# EAGLE board JSDM Wemos DS3231 HUB12 & 08 Single Layer (EAGLE 7.7.0)
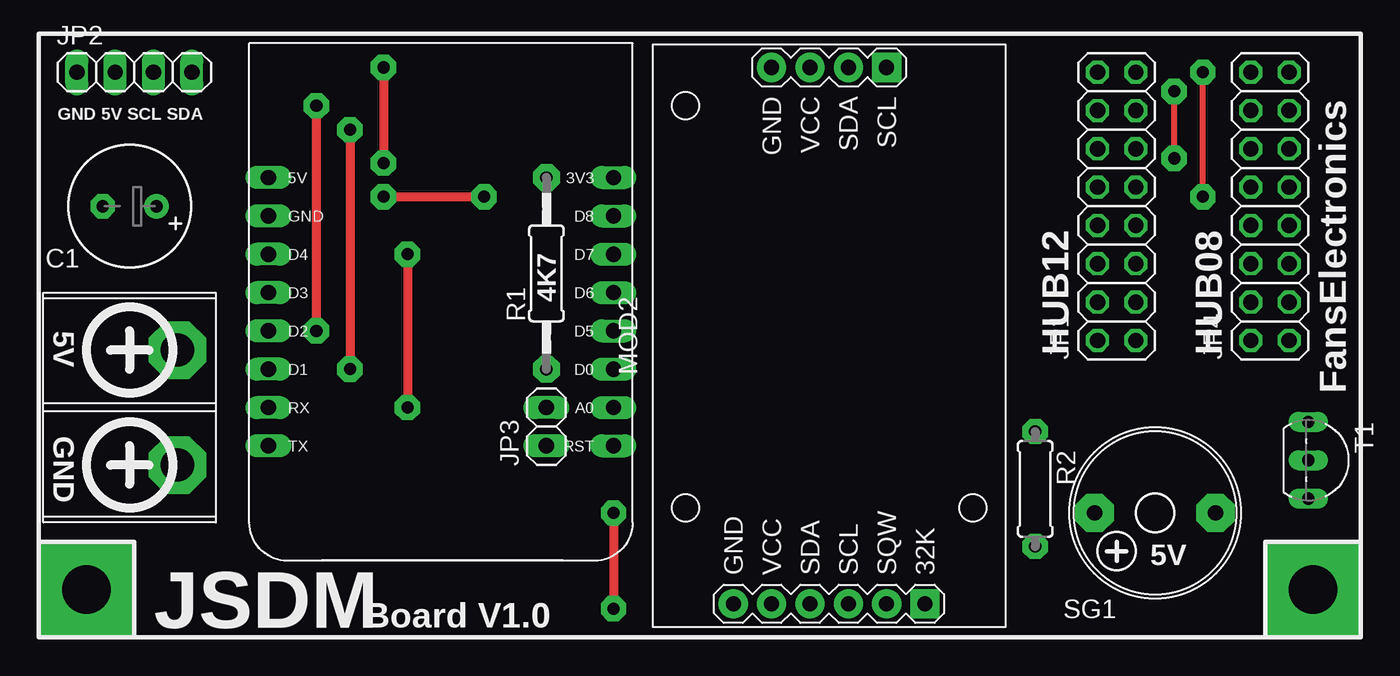
[diagram p0: board, top side]
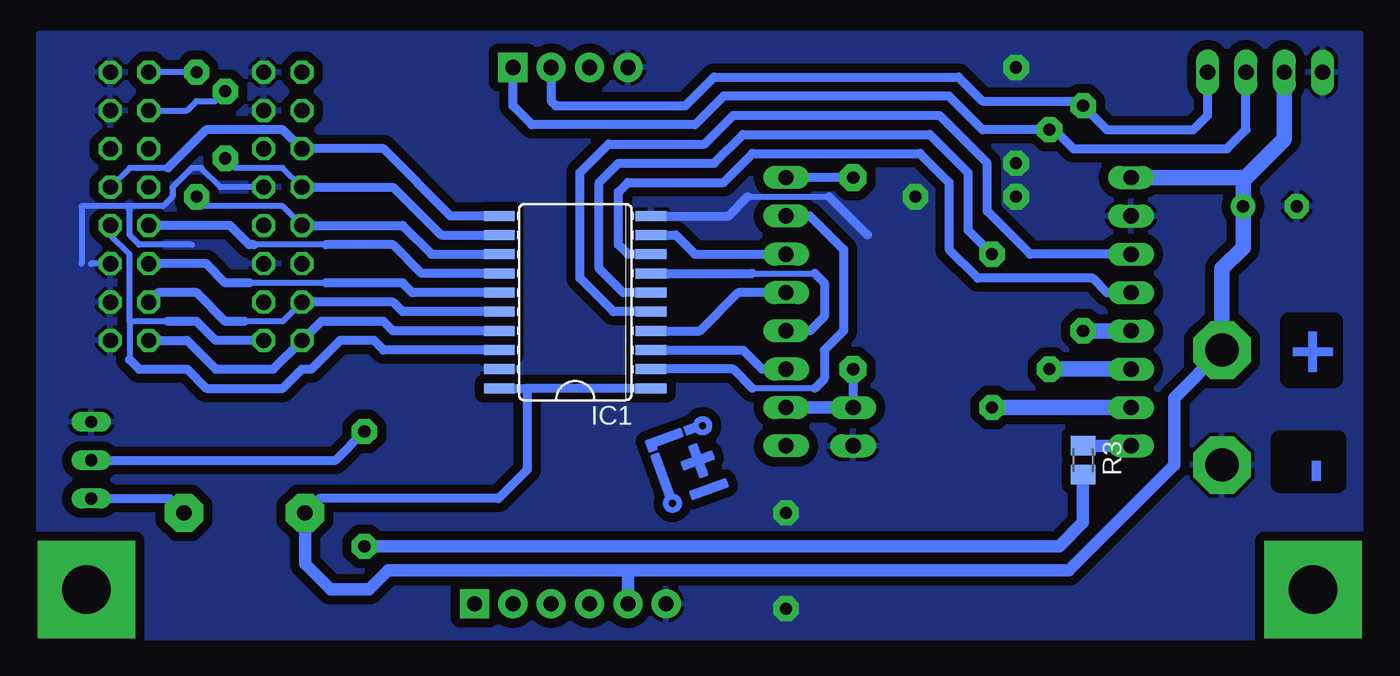
[diagram p1: board, bottom side, seen from below]

No outline drawn. Coordinates in mm, seen from the top.
Copper layers (1*16): Top 0.035mm / dielectric 1.5mm / Bottom 0.035mm
Design rules "default": minimum track width 10mil, minimum drill 24mil, track to track 8mil, track to pad 8mil, pad to pad 8mil, via to via 8mil, smd to smd 8mil, copper to edge 40mil, drill to drill 8mil, minimum pad ring 10mil, minimum via ring 8mil, stop-mask expansion 4mil, vias tented up to drill 0mil, thermal gap 10mil

## Footprints (pad centres in the part's own frame; a part is rotated, then mirrored left to right if it is on the bottom)
E3,5-8 = drill 0.813 pad 1.6: + -1.778,0 | drill 0.813 pad 1.6 octagon: - 1.778,0
SO20 = smd 0.66 x 2.032: 1 -5.715,-5.029; 2 -4.445,-5.029; 3 -3.175,-5.029; 4 -1.905,-5.029; 5 -0.635,-5.029; 6 0.635,-5.029; 7 1.905,-5.029; 8 3.175,-5.029; 9 4.445,-5.029; 10 5.715,-5.029; 11 5.715,5.029; 12 4.445,5.029; 13 3.175,5.029; 14 1.905,5.029; 15 0.635,5.029; 16 -0.635,5.029; 17 -1.905,5.029; 18 -3.175,5.029; 19 -4.445,5.029; 20 -5.715,5.029
2X08 = drill 1.016 octagon: 1 -8.89,-1.27; 2 -8.89,1.27; 3 -6.35,-1.27; 4 -6.35,1.27; 5 -3.81,-1.27; 6 -3.81,1.27; 7 -1.27,-1.27; 8 -1.27,1.27; 9 1.27,-1.27; 10 1.27,1.27; 11 3.81,-1.27; 12 3.81,1.27; 13 6.35,-1.27; 14 6.35,1.27; 15 8.89,-1.27; 16 8.89,1.27
1X04 = drill 1.016 long: 1 -3.81,0; 2 -1.27,0; 3 1.27,0; 4 3.81,0
1X02 = drill 1.016 long: 1 -1.27,0; 2 1.27,0
RTC-DS3231-MIRROR = drill 1 pad 1.93 square: J1.1 -17.78,-6.35; J2.1 17.78,-3.81 | drill 1 pad 1.93: J1.2 -17.78,-3.81; J1.3 -17.78,-1.27; J1.4 -17.78,1.27; J1.5 -17.78,3.81; J1.6 -17.78,6.35; J2.2 17.78,-1.27; J2.3 17.78,1.27; J2.4 17.78,3.81
0207/12 = drill 0.813 pad 1.778 octagon: 1 -6.35,0; 2 6.35,0
0207/7 = drill 0.813 pad 1.676 octagon: 1 -3.81,0; 2 3.81,0
M0805 = smd 1.3 x 1.6: 1 -0.95,0; 2 0.95,0
5V = drill 1.016 pad 2.54 octagon: + 4.01,0; - -4.01,0
TO92-EBC = drill 0.813 long: B 0,-1.27; C 2.54,-1.27; E -2.54,-1.27
WEMOS-D1-MINI = drill 1.016 long: 3V3 -11.43,-8.89; 5V 11.43,-8.89; A0 -11.43,6.35; D0 -11.43,3.81; D1 11.43,3.81; D2 11.43,1.27; D3 11.43,-1.27; D4 11.43,-3.81; D5 -11.43,1.27; D6 -11.43,-1.27; D7 -11.43,-3.81; D8 -11.43,-6.35; GND 11.43,-6.35; RESET -11.43,8.89; RX 11.43,6.35; TX 11.43,8.89
TB2 = drill 2.2 pad 3.81 octagon: 1 -3.81,0; 2 3.81,0

## Placement (x,y rotation side)
C1  [E3,5-8]  31.43,53.34 180 top
IC1  [SO20]  77.47,46.99 90 bottom
JP1  HUB12  [2X08]  96.84,53.34 90 top
JP2  I2C  [1X04]  31.75,62.23 0 top
JP3  [1X02]  59.05,38.73 90 top
JP4  HUB08  [2X08]  107,53.34 90 top
MOD2  RTC-3231MIRROR  [RTC-DS3231-MIRROR]  77.79,44.77 90 top
R1  10K  [0207/12]  59.05,48.9 90 top
R2  2K2  [0207/7]  91.44,34.61 270 top
R3  PROG  [M0805]  43.81,36.51 270 bottom
SG1  5V-PCB  [5V]  99.38,33.02 180 top
T1  [TO92-EBC]  110.81,36.51 270 top
WEMOS1  [WEMOS-D1-MINI]  52.07,46.35 180 top
X1  PSU  [TB2]  34.61,40.01 270 top

## Library data of the parts
C1 R1-R3 = FansElectronics-RCL
IC1 = FansElectronics-IC-74xx
JP1-JP4 = FansElectronics-Header
MOD2 = FansElectronics-Modul
SG1 = FansElectronics-Buzzer
T1 = transistor
WEMOS1 = esp8266modules
X1 = FansElectronics-Con-Screw

## Nets
+5V: C1.+ IC1.1 IC1.20 JP2.2 MOD2.J1.5 SG1.+ WEMOS1.5V X1.1
A: IC1.17 JP1.2 JP4.2
B: IC1.16 JP1.4 JP4.4
C: IC1.15 JP4.6
CLK: IC1.13 JP1.8 JP4.16
D: IC1.14 JP4.8
D0: IC1.3 WEMOS1.D0
D3: IC1.8 WEMOS1.D3
D4: IC1.5 WEMOS1.D4
D5: IC1.7 WEMOS1.D5
D6: IC1.4 WEMOS1.D6
D7: IC1.9 WEMOS1.D7
D8: IC1.2 WEMOS1.D8
GND: C1.- IC1.10 IC1.19 JP1.5 JP1.9 JP1.13 JP1.15 JP2.1 JP3.1 JP4.1 JP4.3 JP4.5 JP4.13 JP4.15 MOD2.J1.6 MOD2.J2.4 T1.E WEMOS1.GND X1.2
N$1: R1.2 WEMOS1.3V3
N$2: SG1.- T1.C
N$3: R2.1 T1.B
N$6: R2.2 R3.2
NOE: IC1.18 JP1.1 JP4.7
R1: IC1.11 JP1.12 JP4.9
RX: IC1.6 WEMOS1.RX
SCL: JP2.3 MOD2.J2.1 WEMOS1.D1
SDA: JP2.4 MOD2.J2.2 WEMOS1.D2
STB: IC1.12 JP1.10 JP4.14
TX: R3.1 WEMOS1.TX
VCC.2: MOD2.J2.3
WIPING: JP3.2 R1.1 WEMOS1.A0

## Tracks (layer width: path | path; a pad name or v marks a point on that pad's centre or on a via)
+5V
  Bottom 0.61: IC1.20 80.64,41.27 | IC1.1 80.64,41.27 | 80.64,41.27 80.64,35.88 82.55,33.97 94.42,33.97 SG1.+
  Bottom 0.813: MOD2.J1.5 73.98,29.21 | 73.98,29.21 89.85,29.21 91.12,27.94 93.66,27.94 95.37,29.64 SG1.+ | X1.1 37.78,40.64 37.78,36.2 44.77,29.21 73.98,29.21
  Bottom 1.016: WEMOS1.5V 33.02,55.24 | 33.02,55.24 30.48,57.78 JP2.2 | 33.02,55.24 33.21,55.05 C1.+ 33.21,50.61 34.61,49.21 X1.1
A
  Bottom 0.61: JP4.2 103.19,44.45 101.28,42.55 97.47,42.55 JP1.2 94.3,45.72 90.17,45.72 89.53,45.09 IC1.17
B
  Bottom 0.406: JP1.4 96.84,45.72 99.38,45.72
  Bottom 0.61: 99.38,45.72 100.65,45.72 102.55,47.62 105.09,47.62 JP4.4 | IC1.16 88.9,46.35 89.53,46.99 JP1.4
C
  Bottom 0.406: 93.98,48.26 99.06,48.26
  Bottom 0.61: IC1.15 88.27,47.62 88.9,48.26 93.98,48.26 | 99.06,48.26 100.65,48.26 101.92,49.53 JP4.6
CLK  (via drill 0.8 pad 1.68)
  Top 0.406: v102.55,53.98 v102.55,62.23
  Bottom 0.406: JP1.8 96.84,53.34 102.55,53.34 v102.55,53.98 | v102.55,62.23 JP4.16
  Bottom 0.61: JP1.8 88.9,52.07 87,50.16 IC1.13
D
  Bottom 0.406: 93.98,50.8 98.74,50.8
  Bottom 0.61: IC1.14 87.63,48.9 89.53,50.8 93.98,50.8 | 98.74,50.8 99.06,50.8 100.33,52.07 JP4.8
D0
  Bottom 0.61: IC1.3 66.36,43.81 65.09,42.55 WEMOS1.D0
D3
  Bottom 0.61: IC1.8 73.98,50.16 74.61,50.8 74.61,54.29 73.98,54.93 67.63,54.93 65.72,56.83 54.61,56.83 52.7,54.93 52.7,50.48 50.8,48.58 43.18,48.58 42.23,47.62 WEMOS1.D3
D4
  Bottom 0.61: IC1.5 74.93,46.35 77.15,48.58 77.15,55.56 75.25,57.47 68.9,57.47 66.99,59.37 53.34,59.37 50.16,56.2 50.16,53.02 47.31,50.16 WEMOS1.D4
D5
  Bottom 0.406: 65.72,48.9 61.59,48.9
  Bottom 0.61: 61.59,48.9 60.96,48.26 60.96,46.04 61.91,45.09 WEMOS1.D5 | IC1.7 65.72,48.9
D6
  Bottom 0.61: WEMOS1.D6 66.67,47.62 69.22,45.09 IC1.4
D7
  Bottom 0.61: IC1.9 70.8,51.44 69.53,50.16 WEMOS1.D7
D8
  Bottom 0.406: 61.59,41.27 65.72,41.27
  Bottom 0.61: WEMOS1.D8 61.91,52.7 59.69,50.48 59.69,45.09 60.96,43.81 60.96,41.91 61.59,41.27 | 65.72,41.27 66.99,42.55 IC1.2
GND  (via drill 0.8 pad 1.68)
  Top 0.61: v63.5,33.02 v63.5,26.67 | v48.26,62.55 v48.26,56.2 | v48.26,53.98 v54.93,53.98
  Bottom 0.406: JP1.9 100.97,54.61 102.23,55.88 102.87,55.88 104.14,54.61 104.14,53.98 104.78,53.34 107,53.34 | 107,53.34 110.17,53.34 110.17,49.53 | JP4.5 109.54,49.53 | 66.04,53.98 60.64,53.98 | 102.87,50.8 106.36,50.8 107,51.44 107,53.34
  Bottom 0.61: IC1.10 67.31,52.7 66.04,53.98 | 60.64,53.98 58.1,51.44
  pour Bottom (isolate 0.61): 25.4,64.77 113.03,64.77 113.03,24.77 25.4,24.77
N$1
  Bottom 0.61: R1.2 WEMOS1.3V3
N$2
  Bottom 0.61: T1.C 104.34,33.97 SG1.-
N$3
  Bottom 0.61: T1.B 93.34,36.51 R2.1
N$4  (via drill 3.2 pad 6.45)
  other vias: 109.86,27.94
N$5  (via drill 3.2 pad 6.45)
  other vias: 28.57,27.94
N$6
  Bottom 0.813: R3.2 43.81,32.38 45.4,30.8 R2.2
NOE
  Bottom 0.406: 104.46,45.72 107,45.72 | 107,45.72 107,50.16 108.27,51.44 JP4.7 | 107,45.72 107,43.18
  Bottom 0.61: JP1.1 101.28,44.45 102.55,45.72 104.46,45.72 | 107,43.18 106.36,42.55 103.19,42.55 101.92,41.27 96.84,41.27 95.57,42.55 94.93,42.55 93.03,44.45 90.81,44.45 90.17,43.81 IC1.18
R1
  Bottom 0.406: 104.46,55.88 107,55.88 JP4.9
  Bottom 0.61: 104.46,55.88 101.92,58.42 96.84,58.42 JP1.12 90.17,57.15 85.72,52.7 IC1.11
RX  (via drill 0.8 pad 1.68)
  Top 0.61: v49.85,50.16 v49.85,40.01
  Bottom 0.61: IC1.6 74.3,47.62 75.88,49.21 75.88,54.93 74.61,56.2 68.26,56.2 66.36,58.1 53.98,58.1 51.44,55.56 51.44,51.75 v49.85,50.16
  Bottom 1.016: v49.85,40.01 WEMOS1.RX
SCL  (via drill 0.8 pad 1.68)
  Top 0.61: v46.04,58.42 v46.04,42.55
  Bottom 0.61: JP2.3 33.02,58.42 34.29,57.15 44.45,57.15 45.72,58.42 v46.04,58.42 50.48,58.42 52.7,60.64 67.63,60.64 69.53,58.74 80.33,58.74 81.6,60.01 MOD2.J2.1
  Bottom 1.016: v46.04,42.55 WEMOS1.D1
SDA  (via drill 0.8 pad 1.68)
  Top 0.61: v43.81,45.09 v43.81,60.01
  Bottom 0.61: JP2.4 35.56,59.37 36.51,58.42 42.23,58.42 v43.81,60.01 44.13,60.33 50.48,60.33 52.07,61.91 68.26,61.91 70.17,60.01 78.74,60.01 79.06,60.33 MOD2.J2.2
  Bottom 1.016: WEMOS1.D2 v43.81,45.09
STB  (via drill 0.8 pad 1.68)
  Top 0.406: v100.65,56.52 v100.65,60.96
  Bottom 0.406: JP1.10 96.84,55.88 100.01,55.88 v100.65,56.52 | v100.65,60.96 101.28,60.33 102.55,60.33 103.19,59.69 JP4.14
  Bottom 0.61: JP1.10 89.53,54.61 86.36,51.44 IC1.12
TX
  Bottom 0.813: WEMOS1.TX R3.1
WIPING
  Bottom 0.61: R1.1 JP3.2
  Bottom 0.813: JP3.2 WEMOS1.A0
(copper drawn outside any net)
  shapes: Bottom area x6060

## Text on the board
Bottom: + | -
tPlace: GND 5V SCL SDA | 4K7 | 5V | HUB12 | HUB08 | FansElectronics | GND | 5V | JSDM | Board V1.0